# EAGLE board STorM32 NT imu mini v11 imu v11 logger v10 splitter v10 panelized (EAGLE 6.5.0)
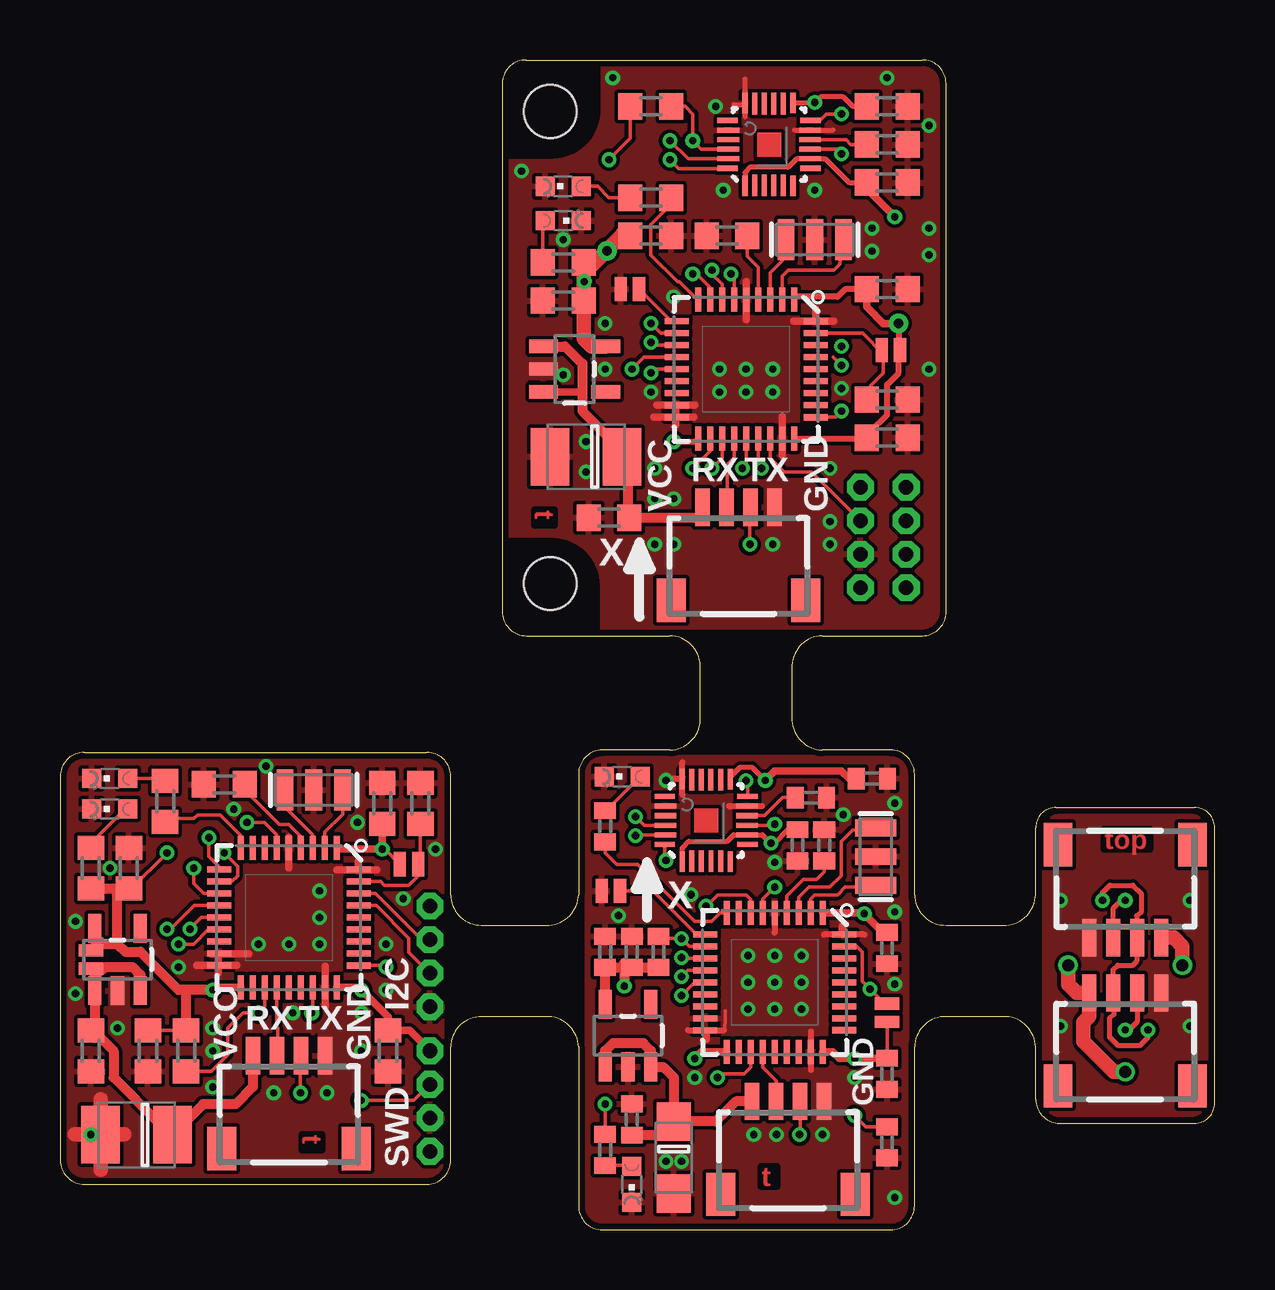
[diagram p0: board, top side]
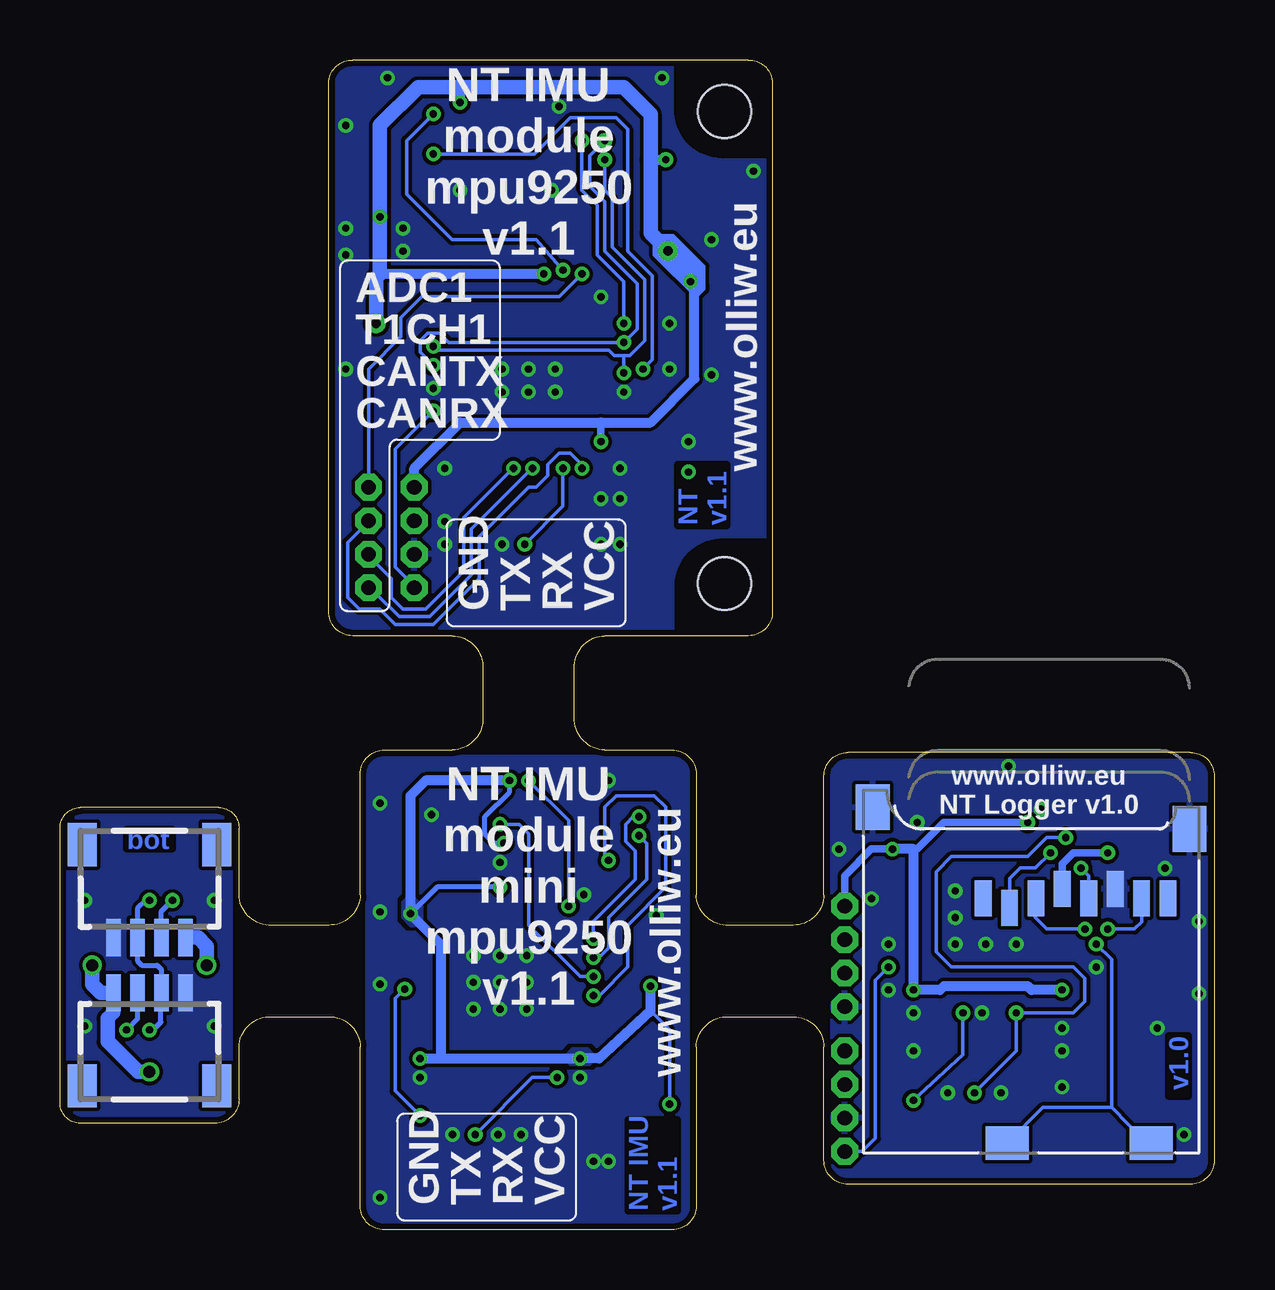
[diagram p1: board, bottom side, seen from below]

Size 48.1 x 48.77 mm. Coordinates in mm from the lower left corner, seen from the top.
Outline: 21.59,19 arc-90 22.59,20 25.4,20 arc90 26.67,21.35 26.67,23.42 arc90 25.4,24.76 19.41,24.76 arc-90 18.41,25.76 18.41,47.8 arc-90 19.41,48.77 35.91,48.77 arc-90 36.91,47.8 36.91,25.76 arc-90 35.91,24.76 31.75,24.76 arc90 30.48,23.42 30.48,21.35 arc90 31.75,20 34.59,20 arc-90 35.59,19 35.59,13.97 arc90 36.91,12.7 39.29,12.7 arc90 40.64,13.97 40.64,16.76 arc-90 41.48,17.6 47.26,17.6 arc-90 48.1,16.76 48.1,5.29 arc-90 47.26,4.45
Outline: 47.26,4.45 41.64,4.45 arc-90 40.64,5.45 40.64,7.62 arc90 39.29,8.89 36.91,8.89 arc90 35.59,7.62 35.59,1 arc-90 34.59,0 22.59,0 arc-90 21.59,1 21.59,7.62 arc90 20.24,8.89 17.54,8.89 arc90 16.27,7.62 16.27,2.91 arc-90 15.27,1.91 1,1.91 arc-90 0,2.91 0,18.9 arc-90 1,19.9 15.27,19.9 arc-90 16.27,18.9 16.27,13.97 arc90 17.54,12.7 20.24,12.7 arc90 21.59,13.97 21.59,19
Outline: 47.26,4.45 47.29,4.45
Outline: 21.59,19.05 21.59,19
Copper layers (1*16): Top 0.035mm / dielectric 1.5mm / Bottom 0.035mm
Design rules "Fusion_eagle_rule_v1.1-shapes-supply-changed": minimum track width 6mil, minimum drill 12mil, track to track 6mil, track to pad 6mil, pad to pad 6mil, via to via 6mil, smd to smd 0mil, copper to edge 10mil, drill to drill 10mil, minimum pad ring 10mil, minimum via ring 6mil, stop-mask expansion 2mil, vias tented up to drill 100mil, thermal gap 6mil
Holes 2.2 mm at 20.41,26.94 20.41,46.62

## Footprints (pad centres in the part's own frame; a part is rotated, then mirrored left to right if it is on the bottom)
SMC_A = smd 1.6 x 1.4: + -1.5,0; - 1.5,0
C0402 = smd 0.7 x 0.9: 1 -0.65,0; 2 0.65,0
SMC_B = smd 1.6 x 2.4: + -1.5,0; - 1.5,0
C0603 = smd 1 x 1.1: 1 -0.85,0; 2 0.85,0
QFN-24-3X3 = smd 0.85 x 0.21: 1 -1.725,1; 6 -1.725,-1; 13 1.725,-1; 18 1.725,1 | smd 0.9 x 0.21: 2 -1.7,0.6; 3 -1.7,0.2; 5 -1.7,-0.6; 14 1.7,-0.6; 15 1.7,-0.2; 16 1.7,0.2; 17 1.7,0.6 | smd 0.9 x 0.2: 4 -1.7,-0.2 | smd 0.21 x 0.85: 7 -1,-1.725; 12 1,-1.725; 19 1,1.725; 24 -1,1.725 | smd 0.21 x 0.9: 8 -0.6,-1.7; 9 -0.2,-1.7; 10 0.2,-1.7; 11 0.6,-1.7; 20 0.6,1.7; 21 0.2,1.7; 22 -0.2,1.7; 23 -0.6,1.7
SOT23-5 = smd 0.55 x 1.2: 1 -0.95,-1.3; 2 0,-1.3; 3 0.95,-1.3; 4 0.95,1.3; 5 -0.95,1.3
4X1_1P27_OCT_BILEX = drill 0.61 pad 1.118 octagon: 1 0,0; 2 0,-1.397; 3 0,-2.794; 4 0,-4.191
CHIPLED_0603 = smd 0.8 x 0.8: A 0,-0.75; C 0,0.75
SM04B-SRSS-TB = smd 0.6 x 1.55: 1 -1.5,2.975; 2 -0.5,2.975; 3 0.5,2.975; 4 1.5,2.975 | smd 1.2 x 1.8: FIT@1 -2.8,-0.9; FIT@2 2.8,-0.9
R0402 = smd 0.7 x 0.9: 1 -0.65,0; 2 0.65,0
R0603 = smd 1 x 1.1: 1 -0.85,0; 2 0.85,0
SJ_2S-NO = smd 0.508 x 1.016: 1 -0.381,0; 2 0.381,0
VFQFPN36 = smd 1 x 0.25: 1 -2.9,2; 2 -2.9,1.5; 3 -2.9,1; 4 -2.9,0.5; 5 -2.9,0; 6 -2.9,-0.5; 7 -2.9,-1; 8 -2.9,-1.5; 9 -2.9,-2; 19 2.9,-2; 20 2.9,-1.5; 21 2.9,-1; 22 2.9,-0.5; 23 2.9,0; 24 2.9,0.5; 25 2.9,1; 26 2.9,1.5; 27 2.9,2 | smd 0.25 x 1: 10 -2,-2.9; 11 -1.5,-2.9; 12 -1,-2.9; 13 -0.5,-2.9; 14 0,-2.9; 15 0.5,-2.9; 16 1,-2.9; 17 1.5,-2.9; 18 2,-2.9; 29 1.5,2.9; 30 1,2.9; 31 0.5,2.9; 32 0,2.9; 33 -0.5,2.9; 34 -1,2.9; 35 -1.5,2.9; 36 -2,2.9 | smd 0.27 x 1: 28 2,2.9
MICROSD = smd 0.7 x 1.5: 1 9,-10.64; 2 7.9,-10.24; 3 6.8,-10.64; 4 5.7,-11.04; 5 4.6,-10.64; 6 3.5,-11.04; 7 2.4,-10.64; 8 1.3,-10.64 | smd 1.8 x 1.4: CD1 2,-0.44; CD2 8,-0.44 | smd 1.4 x 1.9: MT1 0.4,-13.54; MT2 13.6,-14.44
RESONATOR-SMD = smd 0.7 x 1.7: 1 -1.2,0; 2 0,0; 3 1.2,0

## Placement (x,y rotation side)
C1  10u/6.3V  [SMC_A]  25.56,3.02 270 top
C2  100n  [C0402]  23.81,4.6 90 top
C3  100n  [C0402]  33.81,18.81 0 top
C4  10n  [C0402]  30.72,16.03 270 top
C5  10u/6.3V  [SMC_B]  3.17,3.97 180 top
C6  100n  [C0402]  31.27,18.02 0 top
C7  1u  [C0402]  22.7,11.59 90 top
C8  100n  [C0402]  31.83,16.03 90 top
C9  100n  [C0402]  34.45,6.51 270 top
C10  100n  [C0402]  23.81,11.59 90 top
C11  100n  [C0402]  34.45,11.75 270 top
C12  100n  [C0603]  1.27,7.46 270 top
C13  1u  [C0603]  3.65,7.46 270 top
C14  100n  [C0603]  6.83,18.57 180 top
C15  100n  [C0603]  13.65,7.46 270 top
C16  100n  [C0603]  2.86,15.08 90 top
C17  100n  [C0603]  13.41,17.78 90 top
C18  10u/6.3V  [SMC_B]  21.91,32.23 180 top
C19  100n  [C0603]  34.45,45.24 0 top
C20  10n  [C0603]  34.45,43.66 0 top
C21  100n  [C0603]  34.45,46.83 0 top
C22  100n  [C0603]  22.86,29.69 180 top
C23  1u  [C0603]  20.95,38.73 180 top
C24  100n  [C0603]  27.78,41.43 180 top
C25  100n  [C0603]  34.45,33.02 0 top
C26  100n  [C0603]  24.61,41.43 0 top
C27  100n  [C0603]  34.45,39.21 0 top
IC1  MPU9250  [QFN-24-3X3]  26.91,17.07 90 top
IC2  [SOT23-5]  23.65,8.1 0 top
IC3  [SOT23-5]  2.38,11.27 0 top
IC4  MPU9250  [QFN-24-3X3]  29.53,45.24 90 top
IC5  [SOT23-5]  21.43,35.88 270 top
JP1  SWD  [4X1_1P27_OCT_BILEX]  15.4,13.49 0 top
JP2  SWD  [4X1_1P27_OCT_BILEX]  15.4,7.46 0 top
JP3  EXT  [4X1_1P27_OCT_BILEX]  35.24,30.96 0 top
JP4  SWD  [4X1_1P27_OCT_BILEX]  33.34,30.96 0 top
LED1  red  [CHIPLED_0603]  23.81,1.91 180 top
LED2  green  [CHIPLED_0603]  23.42,18.89 90 top
LED3  red  [CHIPLED_0603]  2.06,17.54 90 top
LED4  green  [CHIPLED_0603]  2.06,18.81 90 top
LED5  red  [CHIPLED_0603]  20.95,42.07 270 top
LED6  green  [CHIPLED_0603]  20.95,43.5 90 top
NTX  NTX  [SM04B-SRSS-TB]  30.32,2.38 0 top
NTX1  NTX  [SM04B-SRSS-TB]  44.37,6.91 0 top
NTX2  NTX  [SM04B-SRSS-TB]  28.26,27.15 0 top
NTX3  NTX  [SM04B-SRSS-TB]  44.37,15.16 180 bottom
NTX4  NTX  [SM04B-SRSS-TB]  44.37,6.91 0 bottom
NTX5  NTX  [SM04B-SRSS-TB]  44.37,15.16 180 top
NTX6  NTX  [SM04B-SRSS-TB]  9.53,4.29 0 top
R1  4.7k  [R0402]  22.7,3.33 270 top
R2  4.7k  [R0603]  1.27,15.08 90 top
R3  10k  [R0603]  15,17.78 270 top
R4  2.2k  [R0603]  4.37,17.86 90 top
R5  10k  [R0402]  24.92,11.59 270 top
R6  2.2k  [R0402]  22.7,16.83 90 top
R7  10k  [R0402]  34.45,3.65 90 top
R8  4.7k  [R0603]  20.95,40.32 180 top
R9  10k  [R0603]  24.61,46.83 180 top
R10  10k  [R0603]  34.45,34.61 180 top
R11  2.2k  [R0603]  24.61,43.02 180 top
R15  47k  [R0603]  5.24,7.46 90 top
SJ1  POWER  [SJ_2S-NO]  1.27,11.27 90 top
SJ2  BOOT0  [SJ_2S-NO]  34.45,9.05 90 top
SJ3  IMU-ID  [SJ_2S-NO]  22.94,14.13 0 top
SJ4  BOOT0  [SJ_2S-NO]  14.53,15.24 0 top
SJ5  BOOT0  [SJ_2S-NO]  34.61,36.67 180 top
SJ6  IMU-ID  [SJ_2S-NO]  23.73,39.21 0 top
U1  STM32F10XTXU6  [VFQFPN36]  29.77,10.32 270 top
U2  STM32F10XTXU6  [VFQFPN36]  9.53,13.02 270 top
U3  STM32F10XTXU6  [VFQFPN36]  28.57,35.88 270 top
U$1  MICROSD  [MICROSD]  0.64,3.17 180 bottom
Y1  RESONATORSMD  [RESONATOR-SMD]  33.97,15.56 90 top
Y2  RESONATORSMD  [RESONATOR-SMD]  10.56,18.34 180 top
Y3  RESONATORSMD  [RESONATOR-SMD]  31.43,41.27 180 top

## Library data of the parts
C1-C27 R1-R11 R15 = rcl
IC1-IC5 SJ1-SJ6 Y1-Y3 = # SparkFun2
JP1-JP4 = # stdlib
LED1-LED6 = led
NTX NTX1-NTX6 = con-jst2
U1-U3 = # stm32
U$1 = # adafruit

## Nets
3.3V: C3.1 C4.1 C7.1 C9.1 C10.1 C11.1 IC1.1 IC1.8 IC1.13 IC2.5 R1.1 R5.2 SJ2.1 U1.1 U1.6 U1.19 U1.27
3.3V1: C13.1 C15.1 C16.1 C17.1 IC3.5 JP1.1 JP2.1 R2.1 R15.2 SJ1.2 SJ4.1 U2.1 U2.6 U2.19 U2.27 U$1.4
3.3V2: C20.1 C21.1 C23.1 C25.1 C26.1 C27.1 IC4.1 IC4.8 IC4.13 IC5.5 JP4.1 R8.1 R9.2 SJ5.1 U3.1 U3.6 U3.19 U3.27
5V: C1.+ C2.1 IC2.1 IC2.3 NTX.1
5V1: NTX1.1 NTX3.1 NTX4.1 NTX5.1
5V2: C18.+ C22.1 IC5.1 IC5.3 NTX2.1
5V3: C5.+ C12.1 IC3.1 IC3.3 NTX6.1 SJ1.1
ADC1: U1.8
ADC2: JP3.1 U3.8
CANRX: U1.23
CANRX1: JP3.4 U3.23
CANTX: U1.24
CANTX1: JP3.3 U3.24
CD1: U2.15 U$1.CD1 U$1.CD2
CS: IC1.22 R5.1 U1.11
CS1: U2.11 U$1.2
CS2: IC4.22 R9.1 U3.11
GND: C1.- C2.2 C3.2 C4.2 C6.2 C7.2 C8.2 C9.2 C10.2 C11.2 IC1.11 IC1.18 IC1.20 IC2.2 LED1.C LED2.C NTX.4 R7.1 SJ3.1 U1.5 U1.17 U1.18 U1.26 U1.36 Y1.2
GND1: NTX1.4 NTX3.4 NTX4.4 NTX5.4
GND4: C18.- C19.2 C20.2 C21.2 C22.2 C23.2 C24.2 C25.2 C26.2 C27.2 IC4.11 IC4.18 IC4.20 IC5.2 JP4.3 LED5.C LED6.C NTX2.4 R10.1 SJ6.1 U3.5 U3.17 U3.18 U3.26 U3.36 Y3.2
GND5: C5.- C12.2 C13.2 C14.2 C15.2 C16.2 C17.2 IC3.2 JP1.4 JP2.3 LED3.C LED4.C NTX6.4 R3.1 U2.5 U2.17 U2.18 U2.26 U2.36 U$1.6 U$1.MT1 U$1.MT2 Y2.2
INT: IC1.12 U1.7
INT1: IC4.12 U3.7
LED: R6.1 U1.9
LED1: R4.1 U2.9
LED2: R11.1 U3.9
N$1: C8.1 U1.4
N$2: LED2.A R6.2
N$3: R7.2 SJ2.2 U1.35
N$4: LED3.A R2.2
N$5: U1.2 Y1.1
N$6: U1.3 Y1.3
N$7: C14.1 U2.4
N$8: R3.2 SJ4.2 U2.35
N$9: LED1.A R1.2
N$10: LED4.A R4.2
N$11: U2.2 Y2.1
N$12: U2.3 Y2.3
N$13: LED5.A R8.2
N$14: C19.1 IC4.10
N$15: C24.1 U3.4
N$16: R10.2 SJ5.2 U3.35
N$17: LED6.A R11.2
N$18: U3.2 Y3.1
N$19: U3.3 Y3.3
N$20: C6.1 IC1.10
N$21: SJ6.2 U3.10
RX: NTX.2 U1.22
RX1: NTX1.2 NTX3.2 NTX4.2 NTX5.2
RX2: SJ3.2 U1.10
RX3: NTX6.2 U2.22
RX4: NTX2.2 U3.22
SCK: U2.12 U$1.5
SCK1: IC1.23 U1.12
SCK2: IC4.23 U3.12
SCL1: JP1.3 U2.33
SDA1: JP1.2 U2.34
SDI: U2.14 U$1.3
SDI1: IC1.24 U1.14
SDI2: IC4.24 U3.14
SDO: IC1.9 U1.13
SDO1: U2.13 U$1.7
SDO2: IC4.9 U3.13
SWCLK: U1.28
SWCLK1: JP2.4 U2.28
SWCLK2: JP4.4 U3.28
SWDIO: U1.25
SWDIO1: JP2.2 U2.25
SWDIO2: JP4.2 U3.25
T1CH1: U1.20
T1CH2: JP3.2 U3.20
TX: NTX.3 U1.21
TX1: NTX1.3 NTX3.3 NTX4.3 NTX5.3
TX2: NTX6.3 R15.1 U2.10 U2.21
TX3: NTX2.3 U3.21

## Tracks (layer width: path | path; a pad name or v marks a point on that pad's centre or on a via)
3.3V  (via drill 0.3)
  Top 0.152: IC2.5 22.7,9.56 | 34.59,7.14 C9.1 SJ2.1 | R5.2 23.49,11.11 | 33.45,13.22 v33.5,13.18 | R1.1 v22.7,5.24 | IC1.13 27.92,18.87 | v29.61,16.11 29.77,16.11 | U1.6 29.27,13.79 v29.77,14.29
  Top 0.203: v29.61,16.11 29.25,16.47 IC1.8 28.05,16.47 27.78,16.19 26.19,16.19 25.91,15.91 IC1.1 | 27.92,18.87 28.34,19.29 28.81,19.29 v29.37,18.73 | 29.77,16.11 30.34,16.68 C4.1
  Top 0.305: U1.27 32.19,7.42 32.46,7.14 v33.1,7.14 34.59,7.14 | v26.43,7.14 26.71,7.42 U1.19 | C11.1 34.27,12.4 v33.5,13.18 | U1.1 33.45,13.22 | C3.1 32.86,18.81 32.54,19.13 29.77,19.13 v29.37,18.73
  Top 0.406: 22.7,9.56 C7.1 C10.1 R5.2 | 23.49,11.11 v23.49,10.16
  Bottom 0.152: v22.7,5.24 22.7,8.33 23.49,9.13
  Bottom 0.203: v29.61,16.11 30,16.11 30.4,16.51 30.4,17.22 29.37,18.26 v29.37,18.73 | v29.77,14.29 32.39,14.29 v33.5,13.18
  Bottom 0.406: v33.1,7.14 32.23,7.14 | 32.23,7.14 v26.43,7.14 25.64,7.14 23.49,9.13 v23.49,10.16 | v29.37,18.73 32.86,18.73 33.5,18.1 v33.5,13.18 32.23,11.91 32.23,7.14
  pour Bottom: 25.88,7.06 26.04,6.91 26.83,6.91 26.99,7.06 26.99,7.3 26.75,7.54 26.11,7.54 25.88,7.3
  pour Bottom: 33.02,13.49 33.34,13.81 33.66,13.81 33.81,13.65 33.81,13.02 33.5,12.7 33.02,12.7
3.3V1  (via drill 0.3)
  Top 0.152: 1.59,11.97 1.59,12.06 IC3.5 1.46,12.54 | U2.6 9.03,16.45 8.49,16.99 v7.78,16.99 | C16.1 2.96,14.23 v4.45,15.72 | R15.2 C13.1 | 12.43,10.12 v12.54,10 | U2.1 11.57,15.88 | SJ4.1 13.51,15.88 v13.41,15.88
  Top 0.305: JP2.1 14.55,8.31 C15.1 13.65,8.89 v12.54,10 | U2.27 12.43,10.12 | U2.19 6.47,10.12 v6.35,10 | 11.57,15.88 v13.41,15.88 C17.1
  Top 0.406: 1.59,11.97 SJ1.2 | R2.1 2.38,14.23 | 2.38,14.23 C16.1 | 2.38,11.91 2.7,11.59 3.33,11.59 4.92,10 5.24,10 | 2.38,11.91 2.38,14.23 | 2.38,11.91 1.75,11.91 1.59,12.06 | v6.35,10 5.24,10 | R15.2 5.24,10
  Bottom 0.305: U$1.4 6.33,15.26 5.87,15.72 v4.45,15.72 | 12.54,15.88 12.38,15.88 11.27,16.99 v7.78,16.99 | JP1.1 15.4,14.76 14.29,15.88 v13.41,15.88
  Bottom 0.406: v6.35,10 7.62,10 7.78,10.16 11.27,10.16 11.43,10 v12.54,10 12.54,15.88 v13.41,15.88
3.3V2  (via drill 0.3, 0.4 pad 0.81)
  Top 0.152: 30.62,38.89 U3.1 | 33.76,32.98 C25.1 | 21.81,38.25 C23.1 | 34.93,36.1 SJ5.1 34.93,36.77 | 26.46,32.86 U3.19 | U3.6 28.07,39.71 v27.94,39.85 | 21.98,40.02 21.8,40.01 | v22.86,44.61 23.76,45.51 R9.2 | IC4.13 30.55,46.99
  Top 0.203: IC4.1 28.53,44.09 28.73,44.29 30.32,44.29 30.67,44.64 IC4.8 31.87,44.64 32.86,43.66 C20.1 | C21.1 33.02,46.83 32.62,47.23 31.67,47.23 v31.43,46.99 30.55,46.99
  Top 0.254: C27.1 32.7,39.21 32.39,38.89 30.62,38.89 | U3.27 33.76,32.98 33.76,33.28 34.45,33.97 34.45,35.24 34.93,35.72 34.93,36.1 34.93,36.77 v34.93,37.78 | v25.56,32.86 26.46,32.86
  Top 0.305: C27.1 33.6,38.47 34.29,37.78 v34.93,37.78 | v34.77,42.23 33.6,43.4 C20.1
  Top 0.406: C23.1 21.75,39.53 v21.83,39.53
  Top 0.61: R8.1 21.8,40.01 C23.1 21.8,37.16 22.13,36.83 IC5.5 | 21.98,40.02 v22.77,40.81 23.57,41.67 23.67,41.29 C26.1
  Bottom 0.152: 34.61,39.85 34.77,39.85 | 21.67,39.29 21.67,39.71 v22.77,40.81 | 21.27,39.37 21.27,39.21 21.59,38.89 23.34,40.64 23.34,41.12 23.02,41.43 22.54,41.43 21.27,40.16 21.27,39.37 | 21.59,39.21 21.43,39.21 21.27,39.37
  Bottom 0.254: 21.59,38.89 21.67,39.29
  Bottom 0.305: v25.56,32.86 25.56,33.66
  Bottom 0.406: 21.67,39.29 21.67,35.48 23.49,33.66 25.56,33.66 31.43,33.66 33.34,31.75 JP4.1 | v27.94,39.85 34.61,39.85 | 23.49,44.61 v22.86,44.61 | v34.77,42.23 34.77,41.91 | v31.43,46.99 31.43,47.62 | 21.43,40.01 22.7,41.27 22.86,41.12 23.18,40.96 23.18,40.8 21.59,39.21 21.43,39.37 | 21.43,39.37 21.43,39.69 22.54,40.8 22.7,40.64 21.43,39.37
  Bottom 0.61: v34.93,37.78 34.93,39.69 34.77,39.85 34.77,41.91 34.77,46.04 33.18,47.62 31.43,47.62 24.61,47.62 23.49,46.51 23.49,44.61 23.49,41.54 v22.77,40.81
5V
  Top 0.152: 25,3.95 C1.+
  Top 0.406: NTX.1 28.14,5.36 27.3,4.52 C1.+ 25.56,6.35 25.11,6.8 IC2.3 24.6,7.46 24.29,7.78 23.02,7.78 22.7,7.46 IC2.1 | C2.1 25,3.95
5V1  (via drill 0.5)
  Top 0.61: v41.99,11.03 41.99,10.24 42.35,9.88 NTX1.1 42.87,8.9 42.62,8.65 42.62,7.86 43.89,6.59 v44.37,6.59 | NTX5.1 46.39,12.19 46.75,11.83 v46.75,11.03
  Bottom 0.61: v41.99,11.03 41.99,11.83 42.35,12.19 NTX3.1 | v46.75,11.03 46.75,10.24 46.39,9.88 NTX4.1 45.87,9.06 46.12,8.81 46.12,7.86 44.85,6.59 v44.37,6.59
5V2
  Top 0.152: C22.1 23.65,29.53 | 23.65,32.62 C18.+ 23.34,32.14 23.34,32.54 | 21.75,34.93 21.75,34.77 | 26.67,29.69 26.83,29.69 | 26.67,29.88 NTX2.1
  Top 0.305: IC5.3 21.75,34.93 | 26.83,29.69 26.67,29.88
  Top 0.406: 23.65,29.53 23.65,32.62 | IC5.1 21.04,36.83 21.75,36.12 21.75,34.77 21.75,34.13 23.34,32.54 | C22.1 26.67,29.69
5V3
  Top 0.152: 1.53,8.15 C12.1 1.43,8 | IC3.3 | SJ1.1 1.5,10.89 1.43,10.64
  Top 0.406: NTX6.1 8.03,5.96 7.3,5.24 5.95,5.24 C5.+ 4.13,4.45 2.22,6.35 2.22,7.46 1.53,8.15 | 1.43,8 IC3.1 1.43,10.64 1.91,10.95 3.02,10.95 3.33,10.64 IC3.3
ADC2  (via drill 0.3)
  Top 0.152: U3.8 27.07,39.28 26.51,39.85 v26.35,39.85
  Bottom 0.152: JP3.1 35.24,35.88 33.89,37.23 33.89,38.02 33.02,38.89 27.3,38.89 v26.35,39.85
CANRX1  (via drill 0.3)
  Top 0.152: v28.42,31.75 28.57,31.91 U3.23
  Bottom 0.152: v28.42,31.75 30.96,29.21 30.96,27.3 32.7,25.56 33.97,25.56 34.93,26.51 35.15,26.51 JP3.4
CANTX1  (via drill 0.3)
  Top 0.152: U3.24 29.07,31.89 v29.21,31.75
  Bottom 0.152: v29.21,31.75 31.27,29.69 31.27,27.46 32.86,25.88 33.81,25.88 34.29,26.35 34.29,27.15 35.15,28 JP3.3
CD1  (via drill 0.3)
  Top 0.152: U2.15 6.17,12.52 5.56,11.91 v4.92,11.91
  Bottom 0.152: 8.89,3.71 U$1.CD2 7.14,5.11 4.29,5.11 | v4.92,11.91 4.29,11.27 4.29,5.11 | 4.29,5.11 2.86,3.65 2.7,3.3 U$1.CD1
CS  (via drill 0.3)
  Top 0.152: U1.11 26.2,11.82 v25.88,12.14 24.99,12.14 R5.1 | IC1.22 24.33,16.87 v23.97,17.22
  Bottom 0.152: v25.88,12.14 25.88,12.86 24.13,14.61 24.13,15.8 24.53,16.19 24.53,16.91 24.21,17.22 v23.97,17.22
CS1  (via drill 0.3)
  Top 0.152: U2.11 7.14,14.52 7.38,14.76 7.38,15.16 v6.83,15.72
  Bottom 0.152: U$1.2 8.54,14.64 8.1,15.08 7.46,15.08 v6.83,15.72
CS2  (via drill 0.3)
  Top 0.152: U3.11 25.01,37.38 v24.61,37.78 | 25.4,46.73 R9.1 26.04,46.83 26.35,46.51 v26.35,45.4 26.71,45.04 IC4.22
  Bottom 0.152: v24.61,37.78 24.61,39.53 25.72,40.64 25.72,42.7 26.35,43.34 v26.35,45.4
GND  (via drill 0.3 pad 0.61)
  Top 0.152: 27.66,8.32 27.7,8.68 27.7,9.13 | IC1.11 28.34,17.66 27.86,17.66 | 32.58,12.38 32.65,12.64 U1.36 | 26.99,8.32 26.79,8.24 U1.18 26.94,8.3 26.91,7.94 | 25.92,18.89 25.83,18.88 IC1.18 25.8,18.84 25.8,18.81
  Top 0.254: 29.77,13.57 29.77,12.38 | 33.5,12.31 31.83,12.31 | 26.15,8.32 26.99,8.32 27.66,8.32 | 27.86,17.66 29.23,17.66 | 25.92,18.14 25.92,18.89 25.92,19.49 | 25.52,18.81 25.8,18.81 | 31.27,8.26 31.27,6.67
  Top 0.305: 32.58,12.38 32.58,12.66 | 26.91,8.26 26.91,7.94
  other vias: 28.65,10.32 30.88,10.32 29.77,10.32 28.65,9.21 29.77,9.21 30.88,9.21 31.75,3.97 28.89,3.97 28.65,11.43 29.77,11.43 30.88,11.43 26.43,6.35 33.1,6.35 23.26,13.1 34.77,17.78 34.77,13.26 34.77,10.24 25.24,2.86 25.88,2.86 26.27,13.97 25.24,18.73 29.77,15.32 32.62,17.3 34.77,1.35 29.84,3.97
  pour Bottom (isolate 0.152, rank 2): 21.92,19.06 arc-90 22.59,19.73 34.64,19.73 arc-90 35.31,19.06 35.31,1 arc-90 34.64,0.33 22.59,0.33 arc-90 21.92,1
  pour Top (isolate 0.152): 21.92,19.06 arc-90 22.59,19.73 34.64,19.73 arc-90 35.31,19.06 35.31,1 arc-90 34.64,0.33 22.59,0.33 arc-90 21.92,1
  pour Top (no thermals): 31.35,6.35 32.46,6.35 32.46,4.13 31.35,4.13
GND1  (via drill 0.3)
  other vias: 41.67,8.49 47.07,8.49 41.67,13.73 47.07,13.73
  pour Bottom (isolate 0.152): 40.97,16.6 arc-90 41.64,17.27 47.1,17.27 arc-90 47.77,16.6 47.77,5.45 arc-90 47.1,4.77 41.64,4.77 arc-90 40.97,5.45
  pour Top (isolate 0.152): 40.97,16.6 arc-90 41.64,17.27 47.1,17.27 arc-90 47.77,16.6 47.77,5.45 arc-90 47.1,4.77 41.64,4.77 arc-90 40.97,5.45
  pour Top (no thermals): 45.48,10.87 46.51,10.87 46.51,8.65 45.48,8.65
  pour Top (no thermals): 43.26,13.26 43.26,11.03 42.31,11.03 42.31,13.26
  pour Bottom (no thermals): 45.4,13.26 45.4,11.03 46.43,11.03 46.43,13.26
  pour Bottom (no thermals): 42.23,11.03 43.34,11.03 43.34,8.41 42.23,8.41
GND4  (via drill 0.3 pad 0.61)
  Top 0.152: U3.17 25.67,34.25 25.64,34.21
  Top 0.203: 30.6,45.84 32.19,45.84 | 28.54,46.4 28.54,47.98 | 28.06,46.91 28.5,46.91
  Top 0.305: 28.57,39.53 28.57,37.94 | 32.23,37.87 30.56,37.87 | 24.84,34.37 26.43,34.37 | 24.72,33.88 26.39,33.88 | 30.08,33.89 30.08,32.31 | 31.47,37.94 31.47,38.38 | 25.64,33.58 25.64,34.21
  other vias: 20.95,41.27 27.46,35.88 29.69,35.88 28.57,35.88 27.46,34.93 28.57,34.93 29.69,34.93 25.56,38.89 27.62,43.34 31.43,43.34 32.07,31.75 24.76,31.75 21.91,32.86 21.91,31.59 19.21,44.13 32.07,28.57 32.54,35.08 29.69,28.57 25.56,28.57 24.76,28.57 22.7,35.88 33.81,40.8 36.2,40.64 33.81,41.75 25.56,30.48 24.76,30.48 24.61,34.93 32.07,29.53 36.2,41.75 36.2,35.88 22.7,37.78 20.95,35.64 36.2,46.04 27.3,46.83 23.02,48.02 34.45,48.02
  pour Bottom (isolate 0.152): 18.74,47.8 arc-90 19.41,48.47 35.91,48.47 arc-90 36.58,47.8 36.58,25.76 arc-90 35.91,25.09 19.41,25.09 arc-90 18.74,25.76
  pour Top (isolate 0.152): 18.74,47.8 arc-90 19.41,48.47 35.91,48.47 arc-90 36.58,47.8 36.58,25.76 arc-90 35.91,25.09 19.41,25.09 arc-90 18.74,25.76
  cutout Bottom: 18.68,44.68 20.53,44.68 arc90 22.49,46.73 22.49,48.48 19.43,48.48 arc90 18.68,47.73
  cutout Top: 18.68,44.68 20.53,44.68 arc90 22.49,46.73 22.49,48.48 19.43,48.48 arc90 18.68,47.73
  cutout Bottom: 22.47,25.02 22.47,26.87 arc90 20.41,28.83 18.66,28.83 18.66,25.77 arc90 19.41,25.02
  cutout Top: 22.47,25.02 22.47,26.87 arc90 20.41,28.83 18.66,28.83 18.66,25.77 arc90 19.41,25.02
  pour Top (no thermals): 29.37,31.11 30.32,31.11 30.32,28.89 29.37,28.89
  pour Top (no thermals): 19.37,36.35 20.95,36.35 20.95,35.48 19.37,35.48
GND5  (via drill 0.3 pad 0.61)
  Top 0.152: U2.17 6.62,11.39 6.59,11.35 | 12.42,15.08 12.58,15.08 U2.36
  Top 0.305: 9.53,16.35 9.53,15.08 | 13.18,15.01 11.51,15.01 | 6.27,11.51 7.86,11.51 | 5.67,11.02 7.34,11.02 | 12.42,15.08 12.42,15.36 | 6.59,10.72 6.59,11.35 | 11.04,9.33 11.04,10.99
  Top 0.61: 1.68,2.5 1.68,5.44 | 2.66,3.98 0.59,3.98
  other vias: 10.79,13.02 10.79,14.13 8.26,11.91 9.53,11.91 10.79,11.91 2.38,8.41 6.35,8.41 11.11,5.71 8.89,5.71 9.68,9.05 4.92,10.95 13.57,11.91 0.64,12.86 0.64,9.84 1.27,3.97 13.57,10 6.35,5.95 6.35,7.46 12.38,16.99 2.06,15.08 12.54,7.46 7.22,17.54 8.57,19.33 15.64,15.88 12.54,9.05 14.29,13.81
  pour Bottom (isolate 0.152): 0.33,18.9 arc-90 1,19.58 15.27,19.58 arc-90 15.94,18.9 15.94,2.91 arc-90 15.27,2.23 1,2.23 arc-90 0.33,2.91
  pour Top (isolate 0.152): 0.33,18.9 arc-90 1,19.58 15.27,19.58 arc-90 15.94,18.9 15.94,2.91 arc-90 15.27,2.23 1,2.23 arc-90 0.33,2.91
  pour Top (no thermals): 10.79,8.26 11.75,8.26 11.75,6.03 10.79,6.03
  pour Bottom (isolate 0.254, rank 2, no thermals): 3.65,15.24 3.65,13.18 4.6,13.18 4.6,15.24
  pour Top (no thermals): 2.06,9.21 2.06,10.48 2.22,10.64 2.86,10.64 3.02,10.48 3.02,9.21
INT  (via drill 0.3)
  Top 0.152: IC1.12 28.63,18.67 v28.57,18.72 | U1.7 28.77,13.78 28.57,13.97 27.38,13.97 v26.91,13.49
  Bottom 0.152: v26.91,13.49 26.91,17.07 28.56,18.72 v28.57,18.72
INT1  (via drill 0.3)
  Top 0.152: U3.7 27.57,39.42 27.15,39.85 v27.15,40.01 | IC4.12 31.64,46.24 31.91,46.51 v32.54,46.51
  Bottom 0.152: v27.15,40.01 28.26,41.27 31.75,41.27 33.66,43.18 33.66,45.4 v32.54,46.51
LED
  Top 0.152: R6.1 22.7,15.72 23.18,15.24 24.05,15.24 26.43,12.86 27.15,12.86 27.51,13.22 U1.9
LED1
  Top 0.152: U2.9 7.53,16.45 6.67,17.3 5.71,17.3 5.56,17.14 4.82,17.14 R4.1
LED2
  Top 0.152: R11.1 25.46,42.76 24.61,41.91 24.61,40.64 25.72,39.53 25.8,39.53 26.55,38.78 U3.9
N$1
  Top 0.152: U1.4 30.27,13.91 30.96,14.61 31.51,14.61 31.83,14.92 31.83,15.4 31.67,15.56 C8.1
N$2
  Top 0.152: LED2.A 22.75,17.48 R6.2
N$3  (via drill 0.3)
  Top 0.152: U1.35 33.19,11.82 33.42,11.59 33.42,10.36 v33.73,10.04 34.45,9.33 SJ2.2 | 34.43,4.45 R7.2 33.56,4.3 v33.1,4.76
  Bottom 0.152: v33.73,10.04 34.13,9.64 34.13,5.79 v33.1,4.76
N$4
  Top 0.152: LED3.A 2.78,17.62 1.27,16.11 R2.2
N$5
  Top 0.152: U1.2 31.27,13.8 31.43,13.97 32.39,13.97 32.7,14.29 33.9,14.29 Y1.1
N$6
  Top 0.152: U1.3 30.77,13.86 31.19,14.29 32.07,14.29 32.54,14.76 32.54,16.19 33.02,16.67 33.88,16.67 Y1.3
N$7
  Top 0.152: U2.4 10.03,16.41 9.53,16.91 9.13,16.91 7.94,18.1 7.94,18.47 C14.1
N$8
  Top 0.152: U2.35 13.34,14.52 13.49,14.37 14.53,14.37 15.08,14.92 15.08,15.18 SJ4.2 15,15.26 R3.2
N$9
  Top 0.152: R1.2 23.78,2.68 LED1.A
N$10
  Top 0.152: R4.2 4.03,18.63 4.05,18.81 LED4.A
N$11
  Top 0.152: U2.2 11.03,16.58 11.76,17.31 Y2.1
N$12
  Top 0.152: U2.3 10.53,16.46 9.44,17.55 Y2.3
N$13
  Top 0.152: LED5.A 20.1,41.97 R8.2
N$14
  Top 0.152: IC4.10 32.74,45.44 32.94,45.24 C19.1
N$15
  Top 0.152: U3.4 29.07,40.14 28.63,40.58 C24.1
N$16
  Top 0.152: U3.35 33.43,37.38 34.29,36.51 | 34.29,36.51 SJ5.2 | R10.2 33.76,35.19 34.29,35.72 34.29,36.51
N$17
  Top 0.152: R11.2 22.86,43.02 22.38,43.5 LED6.A
N$18
  Top 0.152: U3.2 30.07,39.76 30.32,40.01 32.23,40.01 32.47,40.25 Y3.1
N$19
  Top 0.152: U3.3 29.57,39.89 30.07,40.39 Y3.3
N$20
  Top 0.152: IC1.10 29.36,17.27 30.11,18.02 C6.1
N$21
  Top 0.152: U3.10 25.46,37.88 24.27,39.07 SJ6.2
RX
  Top 0.152: U1.22 29.27,6.77 29.82,6.21 NTX.2
RX1  (via drill 0.3)
  Top 0.203: v43.42,13.73 43.42,14.05 43.74,14.37 44.69,14.37 45.03,14.03 45.03,13.23 44.85,13.1 NTX5.2 44.87,11.22 44.69,11.03 44.05,11.03 43.87,10.85 NTX1.2 43.89,8.97 43.71,8.83 43.71,8.04 44.05,7.7 45.01,7.7 45.32,8.02 v45.32,8.33
  Bottom 0.203: NTX3.2 43.87,13.28 v43.42,13.73 | NTX4.2 44.87,8.79 v45.32,8.33
RX2
  Top 0.152: U1.10 26.5,12.32 24.69,14.13 SJ3.2
RX3
  Top 0.152: 9.21,7.13 NTX6.2 9.05,7.44 9.05,8.41 9.03,8.44 U2.22
RX4
  Top 0.152: U3.22 28.07,32.2 27.78,31.91 27.78,29.99 NTX2.2
SCK  (via drill 0.3)
  Top 0.152: U2.12 5.99,14.02 5.56,14.45 v5.56,15.08
  Bottom 0.152: 5.4,13.81 U$1.5 5.24,14.76 v5.56,15.08
SCK1  (via drill 0.3)
  Top 0.152: v25.88,11.35 25.92,11.32 U1.12 | IC1.23 24.01,16.47 v23.97,16.43
  Bottom 0.152: v23.97,16.43 23.65,16.11 23.65,14.61 25.24,13.02 25.24,11.75 25.64,11.35 v25.88,11.35
SCK2  (via drill 0.3)
  Top 0.152: 32.2,36.38 v32.54,36.04 | U3.12 24.72,36.88 v24.61,36.99 | IC4.23 26.16,44.64 v25.4,45.4
  Bottom 0.152: v32.54,36.04 33.1,36.59 33.1,37.07 32.78,37.39 32.31,37.39 31.91,36.99 v24.61,36.99 24.05,37.54 24.05,39.45 25.4,40.8 25.4,42.86 26.04,43.5 26.04,44.77 v25.4,45.4
SCL1
  Top 0.152: U2.33 13.15,13.52 14.53,12.14 14.53,11.57 JP1.3
SDA1
  Top 0.152: U2.34 13.13,14.02 15.05,12.1 JP1.2
SDI  (via drill 0.3)
  Top 0.152: U2.14 5.87,13.02 v5.4,12.54
  Bottom 0.152: v5.4,12.54 6.99,12.54 7.46,13.02 7.46,13.79 U$1.3
SDI1  (via drill 0.3)
  Top 0.152: v25.88,9.76 26.43,10.32 U1.14 | IC1.24 25.18,15.46 v25.24,15.4
  Bottom 0.152: v25.24,15.4 25.4,15.56 25.4,17.62 24.92,18.1 23.34,18.1 22.86,17.62 22.86,14.29 24.45,12.7 24.45,10.95 25.64,9.76 v25.88,9.76
SDI2  (via drill 0.3)
  Top 0.152: 32.5,36.88 v32.54,36.83 | U3.14 24.76,35.88 v24.61,35.72 | IC4.24 25.76,44.24 v25.4,44.61
  Bottom 0.152: v32.54,36.83 32.39,36.67 25.24,36.67 25,36.43 24.61,36.43 | 24.61,36.43 24.37,36.43 23.73,37.07 23.73,39.61 25.08,40.96 25.08,43.02 25.4,43.34 v25.4,44.61 | v24.61,35.72 24.61,36.43
SDO  (via drill 0.3)
  Top 0.152: U1.13 26.14,10.82 v25.88,10.56 | IC1.9 29.72,16.87 v29.77,16.91
  Bottom 0.152: v29.77,16.91 28.97,16.91 28.57,16.51 28.57,12.7 26.43,10.56 v25.88,10.56
SDO1  (via drill 0.3)
  Top 0.152: U2.13 5.58,13.52 4.6,12.54 v4.45,12.54
  Bottom 0.152: U$1.7 3.04,12.84 3.33,12.54 v4.45,12.54
SDO2  (via drill 0.3)
  Top 0.152: U3.13 24.31,36.38 v23.81,35.88 | IC4.9 32.35,45.04 v32.54,44.85
  Bottom 0.152: v23.81,35.88 23.42,36.27 23.42,39.77 24.45,40.8 24.45,45.88 24.92,46.36 26.83,46.36 28.34,44.85 v32.54,44.85
SWCLK1  (via drill 0.3)
  Top 0.152: U2.28 13.48,11.02 v13.57,10.95
  Bottom 0.152: JP2.4 14.67,3.27 14.13,3.81 14.13,10.4 v13.57,10.95
SWCLK2  (via drill 0.3)
  Top 0.152: U3.28 32.32,33.88 v32.54,34.13
  Bottom 0.152: JP4.4 33.34,26.83 34.13,27.62 34.13,32.54 v32.54,34.13
SWDIO1  (via drill 0.3)
  Top 0.152: v12.54,5.4 14.73,5.4 JP2.2 | U2.25 10.53,9.1 v10.48,9.05
  Bottom 0.152: v10.48,9.05 10.48,7.3 v12.54,5.4
SWDIO2
  Top 0.152: U3.25 29.57,32.18 30.16,31.59 31.31,31.59 JP4.2
T1CH2  (via drill 0.3)
  Top 0.152: v26.35,31.75 27.07,32.47 U3.20
  Bottom 0.152: JP3.2 35.24,29.53 36.12,28.65 36.12,26.35 35.64,25.88 34.77,25.88 34.13,25.24 32.54,25.24 30.64,27.15 30.64,28.89 28.57,30.96 28.26,30.96 27.78,31.43 27.78,31.91 27.3,32.39 26.83,32.39 26.35,31.91 v26.35,31.75
TX  (via drill 0.3)
  Top 0.152: v30.8,3.97 30.82,3.99 NTX.3 | U1.21 28.77,6.78 28.5,6.51 27.54,6.51 v27.38,6.35
  Bottom 0.152: v27.38,6.35 28.42,6.35 v30.8,3.97
TX1  (via drill 0.3)
  Top 0.203: NTX1.3 44.87,8.68 44.53,8.33 v44.37,8.33 | NTX5.3 43.87,13.39 44.21,13.73 v44.37,13.73
  Bottom 0.203: v44.37,8.33 44.21,8.33 43.89,8.65 43.89,9.86 NTX4.3 43.87,10.85 44.05,11.03 44.69,11.03 44.87,11.22 NTX3.3 44.87,13.39 44.53,13.73 v44.37,13.73
TX2  (via drill 0.3)
  Top 0.152: U2.21 8.53,9.32 v8.26,9.05 7.62,9.05 6.99,8.41 6.99,7.3 6.29,6.61 R15.1 | U2.10 6.62,15.12 6.19,15.56 v6.19,16.35 | NTX6.3 10,7.24 v10,5.71
  Bottom 0.152: v10,5.71 8.26,7.46 v8.26,9.05 5.87,9.05 5.4,9.53 5.4,10.48 5.87,10.95 10.95,10.95 11.59,11.59 11.59,14.92 10.95,15.56 7.78,15.56 6.99,16.35 v6.19,16.35
TX3  (via drill 0.3)
  Top 0.152: U3.21 27.57,32.18 v27.15,31.75 | v28.73,28.57 28.73,29.94 NTX2.3
  Bottom 0.152: v27.15,31.75 27.15,30.16 v28.73,28.57

## Text on the board
Top: t | top | t | t
Bottom: NT / v1.1 | bot | v1.0 | NT IMU / v1.1
tNames: RX | TX | VCC | GND | X | X | I2C | RX | TX | VCC | GND | GND | SWD
bNames: www.olliw.eu | NT IMU / module / mpu9250 / v1.1 | ADC1 | T1CH1 | CANTX | CANRX | VCC | RX | TX | GND | www.olliw.eu / NT Logger v1.0 | www.olliw.eu | NT IMU / module / mini / mpu9250 / v1.1 | VCC | RX | TX | GND